# Altium PCB UPCNSL-ABS-FLS-ARD.PcbDoC (part 2 of 2)
Units mm, origin at the board's own origin, x right, y up, seen from the top; angles counter-clockwise.
Board outline 96 x 90 mm, 2 copper layers (Top Layer, Bottom Layer); 116 components, 156 nets, 541 pads, 110 vias.
Unrouted connection lines stored in the file: 18.
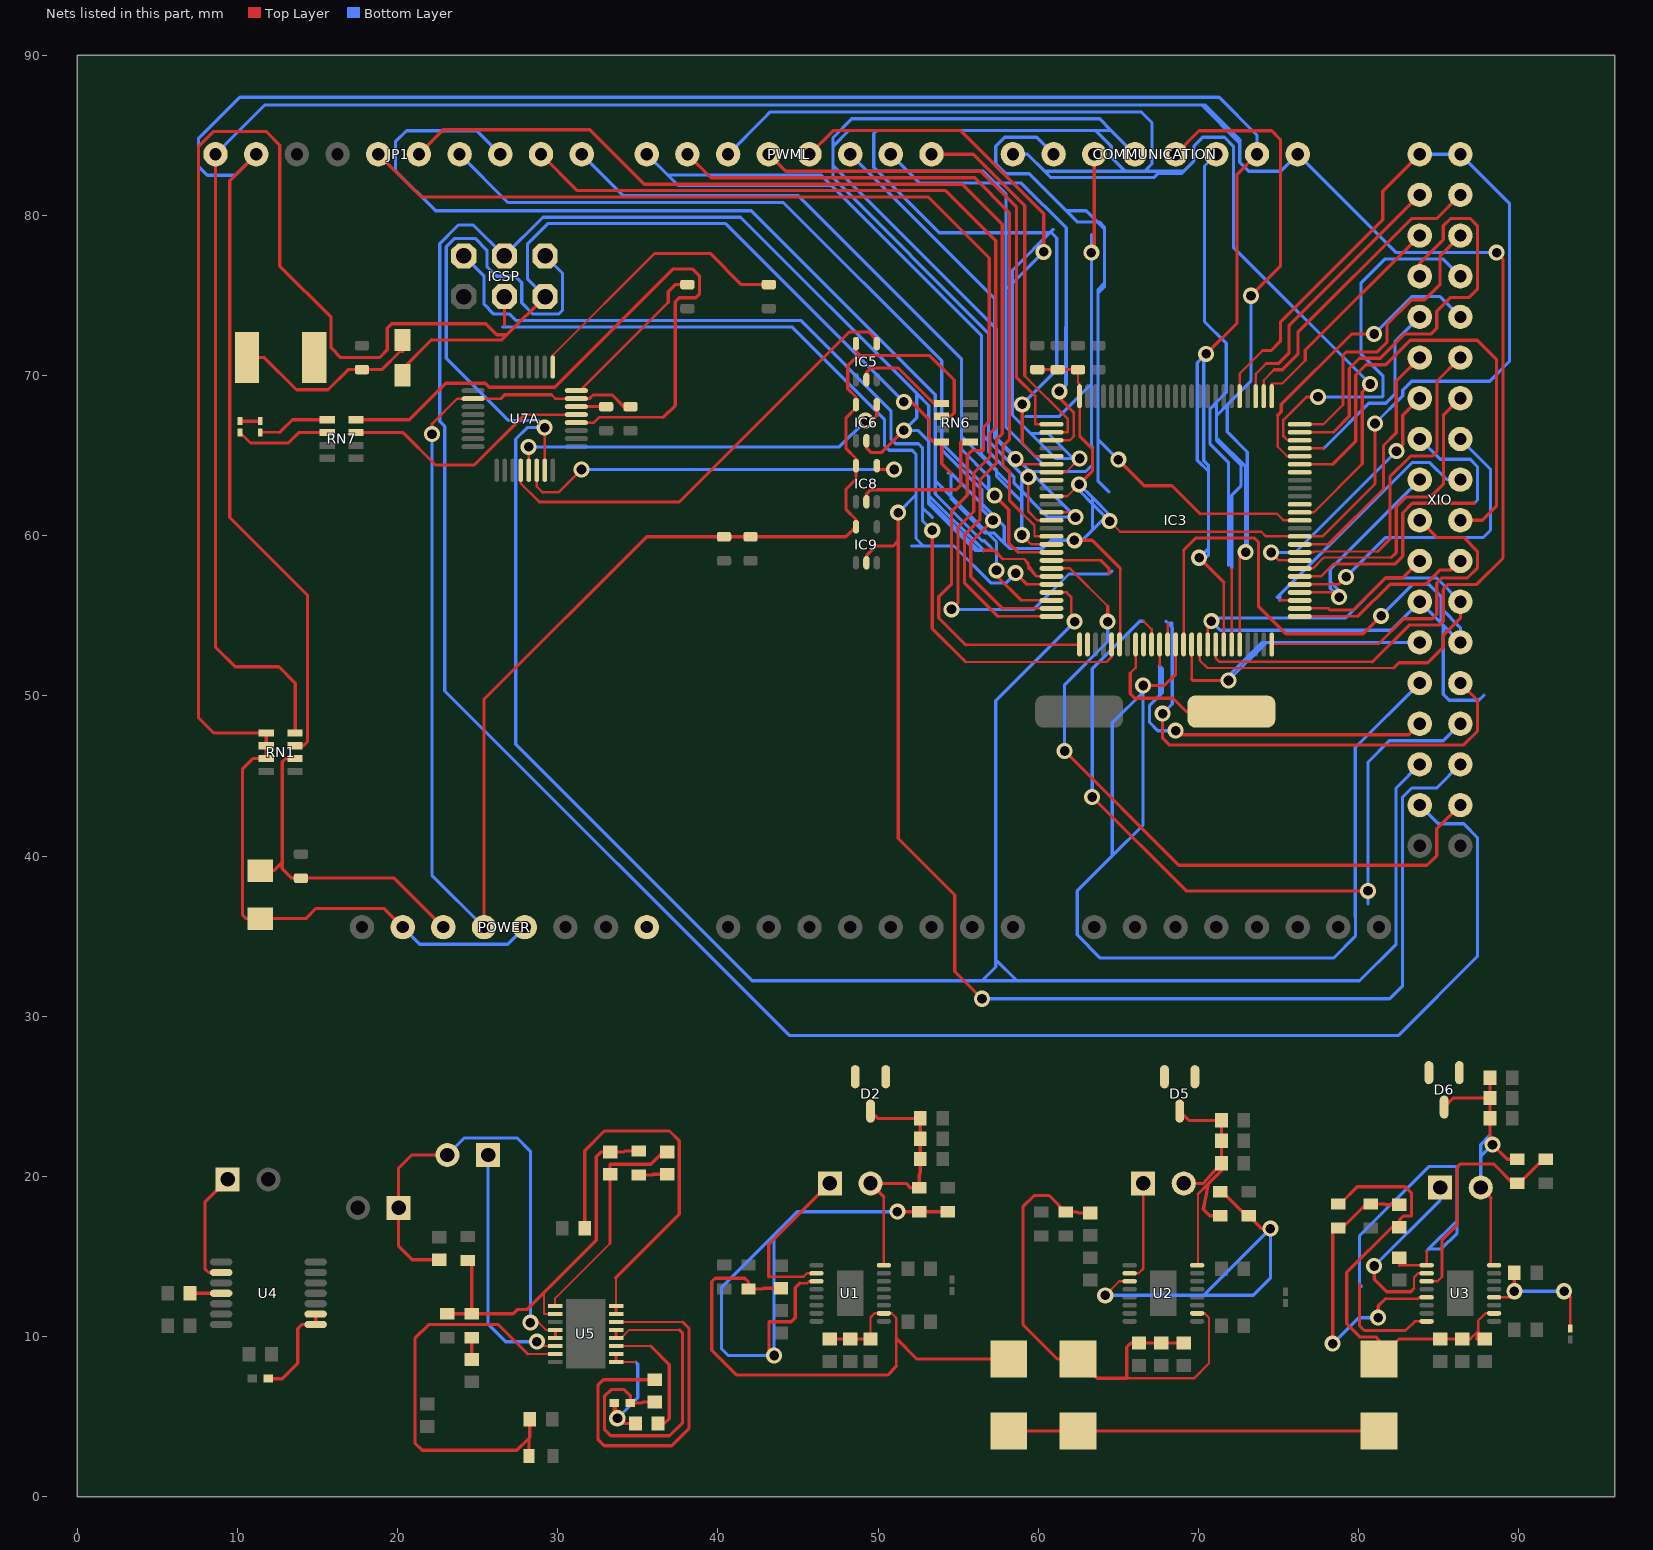
[diagram p2: the nets of this part, all layers, seen from the top]

## Via types
v1: diameter 1, hole 0.6, Top Layer to Bottom Layer, 102 vias
v2: diameter 0.5, hole 0.2, Top Layer to Bottom Layer, 8 vias

## Nets (pads, with @x,y where several pads share a name; then routed paths per layer and width w, separated by ;. In a path a pad name is that pad's centre, name@x,y a point inside that pad or via, vN(x,y) a via of type N, cw(c..) or ccw(c..) an arc to the next point about the centre after c; other vN are vias at no path point) (continued)
NetC25_2: C25.2 L3.2 U3.12 | length 8.3
  Top Layer w0.15: L3.2@93.218,10.51 93.218,12.446
  Top Layer w0.153: U3.12@88.467,12.45 v1@89.459,12.45
  Top Layer w0.2: v1@89.459,12.45 v1@89.724,12.715 ; v1(89.724,12.827) C25.2@89.724,13.97 ; v1(92.837,12.827) 93.218,12.446
  Bottom Layer w0.2: v1@89.724,12.715 v1@89.836,12.827 ; v1(89.724,12.827) v1@89.836,12.827 ; v1(92.837,12.827) v1@89.836,12.827
NetC26_2: C26.2 U3.1 U3.8 | length 30.3
  Top Layer w0.153: 82.55,14.45 U3.1@84.253,14.45 84.253,15.343 ; 82.941,10.376 83.515,10.95 U3.8@84.253,10.95
  Top Layer w0.2: 80.061,13.259 80.061,10.681 80.366,10.376 82.941,10.376 ; 82.55,14.45 C26.2@82.55,14.924
  Bottom Layer w0.2: 80.188,13.132 80.061,13.259 80.061,16.281 84.404,20.625 86.055,20.625 86.157,20.523 86.157,17.247 ; 84.253,15.343 84.379,15.469 ; 84.379,15.469 85.166,15.469 86.157,16.459 86.157,17.247 ; 84.379,15.469 86.157,17.247
NetC27_2: C27.2 R11.1 R12.2 U3.5 | length 19.5
  Top Layer w0.153: 81.686,12.37 83.718,12.37 83.799,12.45 U3.5@84.253,12.45
  Top Layer w0.2: v1(78.384,9.55) 78.384,16.776 R11.1@78.74,16.776 78.994,16.776 80.494,18.276 R12.2@80.772,18.276 81.636,18.276 81.686,18.226 C27.2@82.55,18.226 ; v1(81.229,11.176) 81.229,11.913 81.686,12.37
  Bottom Layer w0.2: v1(78.384,9.55) 80.01,11.176 v1(81.229,11.176)
NetC32_2: C32.2 U4.4 | length 1.9
  Top Layer w0.2: C32.2@7.05,12.7 U4.4@8.988,12.7
NetC34_2: C34.2 P5.2 P6.1 U5.4 U5.5 | length 30.1
  Top Layer w0.125: 28.804,10.871 29.265,10.41 U5.4@29.855,10.41
  Top Layer w0.2: C34.2@22.606,14.794 20.918,14.794 20.066,15.646 P6.1@20.066,18.034 20.066,20.523 20.879,21.336 P5.2@23.114,21.336 ; v1(28.296,10.871) 28.804,10.871 ; U5.5@29.855,9.91 U5.4@29.855,10.41
  Bottom Layer w0.2: P5.2@23.114,21.336 24.181,22.403 27.457,22.403 28.296,21.565 v1(28.296,10.871)
NetC35_1: C35.1 L5.2 U5.12 U5.13 | length 21.9
  Top Layer w0.125: U5.12@33.645,9.91 33.96,9.91 34.464,10.414 37.592,10.414
  Top Layer w0.2: U5.12@33.645,9.91 U5.13@33.645,10.41 ; C35.1@36.068,5.904 35.317,5.904 35.255,5.842 L5.2@34.536,5.842 34.536,6.299 34.147,6.688 33.332,6.688 32.918,6.274 32.918,4.216 33.325,3.81 36.982,3.81 37.795,4.623 37.795,10.211 37.592,10.414
NetC35_2: C35.2 U5.14 | length 24.3
  Top Layer w0.125: U5.14@33.645,10.91 37.795,10.91
  Top Layer w0.2: C35.2@36.068,7.304 32.856,7.304 32.512,6.96 32.512,3.581 32.918,3.175 37.109,3.175 38.202,4.267 38.202,10.504 37.795,10.91
NetC36_1: C36.1 L5.1 U5.9 U5.10 | length 9.1
  Top Layer w0.125: U5.9@33.645,8.41 34.872,8.41
  Top Layer w0.2: v1@33.536,5.072 L5.1@33.536,5.842 v1(33.731,4.902) ; U5.9@33.645,8.41 U5.10@33.645,8.91 ; v1(33.718,4.889) 34.036,4.572 C36.1@34.86,4.572
  Bottom Layer w0.2: v1@33.536,5.072 v1(33.718,4.889) v1(33.731,4.902) 35.001,6.172 35.001,8.28 34.872,8.41
NetC36_2: C36.2 U5.11 | length 8
  Top Layer w0.125: U5.11@33.645,9.41 35.803,9.41
  Top Layer w0.2: 35.803,9.41 36.968,8.245 36.968,4.877 36.663,4.572 C36.2@36.26,4.572
NetC37_2: C37.2 U5.15 U5.16 | length 24
  Top Layer w0.125: 33.63,13.665 33.63,11.91 U5.16@33.645,11.91
  Top Layer w0.2: C37.2@31.688,16.764 31.688,21.604 32.918,22.835 36.982,22.835 37.592,22.225 37.592,17.628 33.63,13.665 ; U5.15@33.645,11.41 U5.16@33.645,11.91
NetC38_2: C38.2 R13.2 U5.7 | length 26.4
  Top Layer w0.125: 28.136,8.91 U5.7@29.855,8.91
  Top Layer w0.2: 28.136,8.91 26.302,10.744 21.946,10.744 21.082,9.881 21.082,3.353 21.539,2.896 27.444,2.896 28.206,3.658 ; R13.2@28.206,2.54 28.206,3.658 ; C38.2@28.256,4.826 28.256,3.708 28.206,3.658
NetC39_1: C39.1 R14.1 R15.1 R16.1 R17.2 U5.2 | length 24.8
  Top Layer w0.125: 29.134,12.725 29.134,11.41 U5.2@29.855,11.41
  Top Layer w0.2: R15.1@23.114,11.418 R16.1@24.638,11.418 ; R17.2@24.384,14.744 24.638,14.744 R16.1@24.638,11.418 ; R14.1@35.052,21.578 34.188,21.578 34.138,21.528 C39.1@33.274,21.528 32.715,21.528 32.41,21.223 32.41,16.002 29.134,12.725 28.102,11.694 27.494,11.694 27.218,11.418 R16.1@24.638,11.418
NetC39_2: C39.2 C40.1 U5.1 | length 14.1
  Top Layer w0.125: U5.1@29.855,11.91 29.845,11.91 29.845,12.395 33.274,15.824
  Top Layer w0.2: 33.274,15.824 C39.2@33.274,20.128 33.274,20.752 35.814,20.752 36.59,21.528 C40.1@36.83,21.528
NetC40_2: C40.2 R14.2 | length 1.8
  Top Layer w0.2: R14.2@35.052,20.078 35.916,20.078 35.966,20.128 C40.2@36.83,20.128
NetC41_2: C41.2 R16.2 | length 1.3
  Top Layer w0.2: C41.2@24.638,8.574 R16.2@24.638,9.918
NetC51_1: C51.1 F2.1 L7.2 | length 12.3
  Top Layer w0.2: F2.1@10.6,71.12 11.684,71.12 13.691,69.113 15.66,69.113 16.916,70.37 C51.1@17.78,70.37 19.025,70.37 20.156,71.501 20.32,71.501 L7.2@20.32,72.22
NetC52_2: C52.2 U7A.25 | length 17.7
  Top Layer w0.15: U7A.25@29.69,70.535 29.69,71.27 36.043,77.622
  Top Layer w0.2: 36.043,77.622 39.522,77.622 41.465,75.68 C52.2@43.18,75.68
NetC53_2: C53.2 U7A.24 | length 10.1
  Top Layer w0.15: U7A.24@31.165,69.06 31.394,69.06 36.896,74.562
  Top Layer w0.2: 36.896,74.562 36.896,75.234 37.342,75.68 C53.2@38.1,75.68
NetC54_1: C54.1 U7A.22 | length 1.9
  Top Layer w0.2: U7A.22@31.165,68.06 C54.1@33.02,68.06
NetD2_1: D2.1
NetD2_2: D2.2
NetD5_1: D5.1
NetD5_2: D5.2
NetD6_1: D6.1
NetD6_2: D6.2
NetF2_2: F2.2
NetL4_1: L4.1 U4.8 U4.9 | length 6.3
  Top Layer w0.2: L4.1@11.93,7.366 12.802,7.366 13.767,8.331 13.767,10.496 14.021,10.75 U4.8@14.888,10.75 U4.9@14.888,11.4
NetP1_1: P1.1 U1.2 | length 10.5
  Top Layer w0.153: 43.18,13.731 45.354,13.731 45.573,13.95 U1.2@46.153,13.95
  Top Layer w0.2: 43.18,13.731 43.18,15.748 P1.1@46.99,19.558
NetP2_1: P2.1 U2.2 | length 6.3
  Top Layer w0.153: U2.2@65.711,13.95 66.274,13.95 66.548,14.224 P2.1@66.548,19.558
NetP3_1: P3.1 U3.2 | length 11.9
  Top Layer w0.153: 83.464,13.005 83.464,13.696 83.718,13.95 U3.2@84.253,13.95
  Top Layer w0.2: v1(80.975,14.402) 80.975,13.589 81.763,12.802 83.261,12.802 83.464,13.005
  Bottom Layer w0.2: v1(80.975,14.402) 85.09,18.517 P3.1@85.09,19.304
NetP4_1: P4.1 U4.2 | length 7.3
  Top Layer w0.2: U4.2@8.988,14 8.2,14 7.976,14.224 7.976,18.39 P4.1@9.398,19.812
NetP5_1: P5.1 U5.6 | length 15.3
  Top Layer w0.125: v1(28.702,9.677) 28.969,9.41 U5.6@29.855,9.41
  Bottom Layer w0.2: P5.1@25.654,21.336 25.654,10.77 26.746,9.677 v1(28.702,9.677)
NetR1_1: R1.1 R2.2 U1.3 | length 38.3
  Top Layer w0.153: 45.11,13.335 45.58,13.335 45.695,13.45 U1.3@46.153,13.45
  Top Layer w0.2: v1(43.51,8.814) 43.192,9.132 43.192,10.922 44.577,10.922 44.831,11.176 44.831,13.056 45.11,13.335 ; v1(51.206,17.792) R1.1@52.578,17.792 R2.2@54.356,17.792
  Bottom Layer w0.2: v1(51.206,17.792) 44.945,17.792 43.51,16.358 ; 43.51,16.358 v1(43.51,8.814) 40.64,8.814 40.234,9.22 40.234,13.081 43.51,16.358
NetR5_1: R5.1 R6.2 U2.3 | length 25.7
  Top Layer w0.153: v1(64.186,12.573) 65.063,13.45 U2.3@65.711,13.45
  Top Layer w0.2: R5.1@71.374,19.038 71.501,19.038 73.001,17.538 R6.2@73.152,17.538 73.951,16.739 v1(74.498,16.739)
  Bottom Layer w0.2: v1(64.186,12.573) 70.333,12.573 ; 70.333,12.573 v1(74.498,16.739) 74.498,13.64 73.431,12.573 70.333,12.573
NetR9_1: R9.1 R10.2 U3.3 | length 15.1
  Top Layer w0.153: U3.3@84.253,13.45 84.938,13.45 85.217,13.729
  Top Layer w0.2: 85.217,13.729 85.217,16.039 86.157,16.978 86.157,20.574 86.36,20.777 88.429,20.777 89.637,19.57 R9.1@89.916,19.57 90.043,19.57 91.543,21.07 R10.2@91.694,21.07
NetRN7_1: RN7.1 Z4.2 | length 4.5
  Top Layer w0.15: Z4.2@11.43,66.452 11.43,66.446 12.649,66.446
  Top Layer w0.2: 12.649,66.446 13.443,67.24 RN7.1@15.61,67.24
NetRN7_2: RN7.2 U7A.20 | length 41.7
  Top Layer w0.15: U7A.20@31.165,67.06 32.258,67.06 32.584,67.386 36.601,67.386
  Top Layer w0.2: RN7.2@17.41,67.24 20.735,67.24 23.015,69.52 25.476,69.52 25.73,69.266 29.82,69.266 37.211,76.657 38.405,76.657 38.862,76.2 38.862,75.108 38.608,74.854 37.592,74.854 37.338,74.6 37.338,68.123 36.601,67.386
NetRN7_3: RN7.3 Z3.2 | length 6
  Top Layer w0.15: Z3.2@10.16,66.452 10.826,65.786
  Top Layer w0.2: 10.826,65.786 13.183,65.786 13.837,66.44 RN7.3@15.61,66.44
NetRN7_4: RN7.4 U7A.21 | length 15.9
  Top Layer w0.15: 27.936,67.56 U7A.21@31.165,67.56
  Top Layer w0.2: RN7.4@17.41,66.44 20.347,66.44 22.373,64.414 24.79,64.414 27.936,67.56
NetX3_S1: Z3.1 Z4.1 | length 1.3
  Top Layer w0.2: Z3.1@10.16,67.152 Z4.1@11.43,67.152
PA0: IC3.78 XIO.3 | length 17.3
  Top Layer w0.15: IC3.78@73.58,68.71 73.58,70.104 74.234,70.758
  Top Layer w0.2: 74.234,70.758 75.025,70.758 75.656,71.389 75.656,73.116 XIO.3@83.82,81.28
PA1: IC3.77 XIO.4 | length 18.9
  Top Layer w0.15: IC3.77@74.08,68.71 74.08,69.71 74.728,70.358
  Top Layer w0.2: 74.728,70.358 75.248,70.358 76.213,71.323 76.213,72.708 83.312,79.807 84.887,79.807 XIO.4@86.36,81.28
PA2: IC3.76 XIO.5 | length 14.2
  Top Layer w0.15: IC3.76@74.58,68.71 74.58,69.5 75.239,69.5 76.676,70.937
  Top Layer w0.2: 76.676,70.937 76.676,71.596 XIO.5@83.82,78.74
PA3: IC3.75 XIO.6 | length 18.4
  Top Layer w0.15: IC3.75@76.33,66.96 77.808,66.96 79.026,68.178
  Top Layer w0.2: 79.026,68.178 79.026,71.253 79.248,71.475 81.165,71.475 81.775,72.085 81.775,73.19 83.312,74.727 84.125,74.727 85.09,75.692 85.09,77.47 XIO.6@86.36,78.74
PA4: IC3.74 XIO.7 | length 27.4
  Top Layer w0.15: IC3.74@76.33,66.46 78.435,66.46
  Top Layer w0.2: 78.435,66.46 79.426,67.451 79.426,70.441 80.061,71.075 81.369,71.075 82.891,72.598 84.536,72.598 84.887,72.949 84.887,74.016 85.75,74.879 86.919,74.879 87.422,75.382 87.422,79.35 86.97,79.802 85.75,79.802 85.293,79.345 85.293,78.486 83.82,77.013 XIO.7@83.82,76.2
PA5: IC3.73 XIO.8 | length 23.9
  Top Layer w0.15: IC3.73@76.33,65.96 75.565,65.96 75.305,66.22 75.305,67.228 76.746,68.669
  Top Layer w0.2: 76.746,68.669 v1(77.47,68.669)
  Bottom Layer w0.2: v1(77.47,68.669) 81.483,68.669 81.534,68.72 81.534,69.952 80.162,71.323 80.162,75.794 81.636,77.267 85.293,77.267 XIO.8@86.36,76.2
PA6: IC3.72 XIO.9 | length 12.8
  Top Layer w0.15: IC3.72@76.33,65.46 77.83,65.46
  Bottom Layer w0.2: 77.83,65.46 78.029,65.659 80.639,68.269 81.706,68.269 82.271,68.834 82.271,72.111 XIO.9@83.82,73.66
PA7: IC3.71 XIO.10 | length 18.9
  Top Layer w0.15: 74.955,67.514 74.955,65.558 75.553,64.96 IC3.71@76.33,64.96
  Top Layer w0.2: 74.955,67.514 75.176,67.735 75.176,68.205 79.564,72.593 v1(80.975,72.593)
  Bottom Layer w0.2: v1(80.975,72.593) 83.312,74.93 85.09,74.93 XIO.10@86.36,73.66
PB0_SS: IC3.19 XIO.34 | length 44.8
  Top Layer w0.15: IC3.19@60.83,57.96 61.976,57.96 64.338,55.598
  Top Layer w0.2: v1(61.646,46.558) 68.783,39.421 84.272,39.421 84.882,40.03 84.882,41.702 XIO.34@86.36,43.18 ; v1(64.338,54.635) 64.338,55.598
  Bottom Layer w0.2: v1(61.646,46.558) 61.646,50.704 64.338,53.396 v1(64.338,54.635)
PB1_SCK: IC3.20 IC6.2 ICSP.3 XIO.33 | length 187.4
  Top Layer w0.15: 57.785,58.547 59.137,58.547 ; IC3.20@60.83,57.46 59.888,57.46 ; 59.137,58.547 59.374,58.31 59.374,58.204 ; 59.137,58.547 59.374,58.204 ; 59.374,58.204 59.888,57.46 ; 59.374,58.204 59.374,57.974 59.888,57.46
  Top Layer w0.2: IC6.2@49.276,65.931 49.276,65.481 49.555,65.202 50.241,65.202 v1(51.613,66.573) ; 56.591,59.088 57.244,59.088 57.785,58.547
  Bottom Layer w0.2: 56.591,59.055 56.591,59.088 ; XIO.33@83.82,43.18 84.988,42.012 86.563,42.012 87.427,41.148 87.427,33.731 82.499,28.804 44.45,28.804 22.952,50.302 22.952,66.826 22.631,67.146 22.631,78.232 23.8,79.4 24.74,79.4 ICSP.3@26.67,77.47 29.083,79.883 41.415,79.883 52.413,68.885 ; 52.413,68.885 52.413,67.373 v1(51.613,66.573) 52.489,66.573 53.168,65.894 ; 52.413,68.885 53.168,68.129 53.168,65.894 ; 53.168,62.177 56.257,59.088 ; 53.168,62.177 53.168,62.51 ; 53.168,62.177 53.168,61.985 56.066,59.088 56.257,59.088 ; 53.168,62.51 53.168,65.894 ; 53.168,62.51 56.591,59.088 ; 56.257,59.088 56.591,59.088
PB2_MOSI: IC3.21 IC9.2 ICSP.4 XIO.32 | length 127.9
  Top Layer w0.15: 59.296,56.96 IC3.21@60.83,56.96
  Top Layer w0.2: 26.67,73.127 ICSP.4@26.67,74.93 ; IC9.2@49.276,58.311 49.276,58.75 49.885,59.36 50.939,59.36 51.257,59.677 ; v1(51.257,61.443) 51.257,59.677 ; v1(56.49,31.09) 54.788,32.791 54.788,37.567 51.257,41.097 51.257,59.677 ; v1(58.598,57.658) 59.296,56.96
  Bottom Layer w0.2: 26.568,73.025 26.772,73.025 ; 26.67,73.127 26.772,73.025 ; v1(51.257,61.443) 52.368,62.554 ; 52.09,59.36 52.832,59.36 ; v1(56.49,31.09) 81.94,31.09 82.753,31.902 82.753,43.688 83.312,44.247 84.887,44.247 XIO.32@86.36,45.72 ; v1(58.598,57.658) 57.981,57.041 57.064,57.041 54.745,59.36 52.832,59.36 ; 26.772,73.025 44.647,73.025 50.4,67.272 50.4,65.634 50.699,65.335 52.127,65.335 52.368,65.094 52.368,62.554 ; 52.368,62.554 52.368,59.823 52.832,59.36
PB3_MISO: IC3.22 ICSP.1 U7A.15 XIO.31 | length 157
  Top Layer w0.15: U7A.15@29.19,64.085 v1(29.19,66.751) ; IC3.22@60.83,56.46 61.773,56.46 62.052,56.181 v1@62.052,54.864
  Top Layer w0.2: v1@62.052,54.864 v1(62.281,54.635)
  Bottom Layer w0.2: ICSP.1@29.21,77.47 30.298,76.382 30.298,74.066 30.074,73.842 28.448,73.842 27.758,74.533 27.758,75.794 27.351,76.2 26.187,76.2 25.582,76.805 25.582,77.826 24.846,78.562 23.571,78.562 23.038,78.029 23.038,71.077 26.92,67.195 28.746,67.195 v1(29.19,66.751) 28.088,66.751 27.377,66.04 27.377,46.967 42.137,32.207 56.49,32.207 ; v1(62.281,54.635) 57.353,49.708 57.353,33.528 ; XIO.31@83.82,45.72 82.347,44.247 82.347,34.493 80.061,32.207 58.674,32.207 ; 56.49,32.207 57.353,33.071 57.353,33.528 ; 56.49,32.207 58.674,32.207 ; 57.353,33.528 58.674,32.207
PB4: IC3.23 JP1.8 | length 71.9
  Top Layer w0.15: 58.932,55.96 IC3.23@60.83,55.96
  Top Layer w0.2: v1(57.399,57.841) 57.399,57.493 58.932,55.96
  Bottom Layer w0.2: JP1.8@26.416,83.82 24.954,85.282 20.561,85.282 19.869,84.591 19.869,82.798 22.384,80.283 42.088,80.283 53.568,68.802 53.568,63.443 ; v1(57.399,57.841) 57.399,58.92 ; 53.568,63.443 53.568,62.603 56.49,59.682 56.637,59.682 57.399,58.92 ; 53.568,63.443 57.399,59.612 57.399,58.92
PB5: IC3.24 JP1.7 | length 61.8
  Top Layer w0.15: 57.756,55.46 IC3.24@60.83,55.46
  Top Layer w0.2: v1(57.175,60.96) 55.791,59.576 55.791,57.424 57.756,55.46
  Bottom Layer w0.2: JP1.7@23.876,83.82 26.892,80.804 44.088,80.804 53.977,70.915 53.977,65.784 ; v1(57.175,60.96) 56.477,61.658 56.477,62.878 53.977,65.378 53.977,65.784 ; 57.582,62.179 53.977,65.784
PB6: IC3.25 JP1.6 | length 69.2
  Top Layer w0.15: 57.486,54.96 IC3.25@60.83,54.96
  Top Layer w0.2: JP1.6@21.336,83.82 22.86,85.344 32.004,85.344 35.401,81.947 55.264,81.947 57.76,79.451 57.76,66.357 57.391,65.989 57.391,64.522 56.375,63.506 56.375,61.022 55.391,60.038 55.391,57.055 57.486,54.96
PB7: IC3.26 JP1.5 | length 74.5
  Top Layer w0.15: 55.461,53.188 62.58,53.188 IC3.26@62.58,53.21
  Top Layer w0.2: JP1.5@18.796,83.82 21.469,81.147 53.129,81.147 56.939,77.337 56.939,67.137 56.591,66.789 56.591,65.329 55.88,65.329 55.575,65.024 55.575,62.514 54.591,61.53 54.591,57 53.785,56.193 53.785,54.864 55.461,53.188
PC0: IC3.53 XIO.18 | length 17
  Top Layer w0.15: 75.079,55.96 IC3.53@76.33,55.96
  Bottom Layer w0.2: 74.905,56.134 75.079,56.308 ; 75.079,55.96 75.079,56.308 ; XIO.18@86.36,63.5 85.522,63.5 84.455,64.567 83.337,64.567 75.079,56.308
PC1: IC3.54 XIO.17 | length 13.8
  Top Layer w0.15: IC3.54@76.33,56.46 v1@78.49,56.46
  Top Layer w0.2: v1@78.49,56.46 v1(78.791,56.159)
  Bottom Layer w0.2: v1(78.791,56.159) 78.232,56.718 78.232,57.125 ; v1@79.197,56.159 78.232,57.125 ; XIO.17@83.82,63.5 78.232,57.912 78.232,57.125
PC2: IC3.55 XIO.16 | length 19.8
  Top Layer w0.15: IC3.55@76.33,56.96 78.753,56.96
  Top Layer w0.2: 78.753,56.96 v1(79.223,57.429)
  Bottom Layer w0.2: v1(79.223,57.429) 81.675,59.882 87.771,59.882 88.24,60.35 88.24,64.16 XIO.16@86.36,66.04
PC3: IC3.56 XIO.15 | length 21.1
  Top Layer w0.15: IC3.56@76.33,57.46 77.666,57.46 78.435,58.229
  Top Layer w0.2: 78.435,58.229 82.263,58.229 82.758,58.725 82.758,61.418 83.362,62.022 87.219,62.022
  Bottom Layer w0.2: XIO.15@83.82,66.04 85.09,64.77 86.97,64.77 87.427,64.313 87.427,62.23 87.219,62.022
PC4: IC3.57 XIO.14 | length 18.6
  Top Layer w0.15: IC3.57@76.33,57.96 77.149,57.96 77.826,58.637 82.049,58.637
  Top Layer w0.2: 82.049,58.637 82.358,58.946 82.358,61.8 82.98,62.422 84.52,62.422 85.298,63.2 85.298,67.518 XIO.14@86.36,68.58
PC5: IC3.58 XIO.13 | length 16.3
  Top Layer w0.15: v1(74.549,58.953) 75.042,58.46 IC3.58@76.33,58.46
  Top Layer w0.2: v1(82.372,65.278) 82.758,65.664 82.758,67.518 XIO.13@83.82,68.58
  Bottom Layer w0.2: v1(74.549,58.953) 76.048,58.953 v1(82.372,65.278)
PC6: IC3.59 XIO.12 | length 19.9
  Top Layer w0.15: IC3.59@76.33,58.96 77.194,58.96 77.246,59.012 81.188,59.012
  Top Layer w0.2: 81.188,59.012 81.958,59.782 81.958,63.67 83.266,64.978 84.626,64.978 84.898,65.25 84.898,69.658 XIO.12@86.36,71.12
PC7: IC3.60 XIO.11 | length 15.8
  Top Layer w0.15: IC3.60@76.33,59.46 78.1,59.46
  Top Layer w0.2: 78.1,59.46 81.558,62.918 81.558,65.634 82.358,66.434 82.358,69.658 XIO.11@83.82,71.12
PD7: IC3.50 XIO.19 | length 21.4
  Top Layer w0.15: IC3.50@74.58,53.21 74.58,53.238 81.248,53.238
  Top Layer w0.2: 81.248,53.238 82.828,54.818 84.612,54.818 84.887,55.093 84.887,57.048 85.196,57.358 86.8,57.358 87.422,57.98 87.422,59.034 86.563,59.893 84.887,59.893 XIO.19@83.82,60.96
PE0: IC3.2 PWML.1 | length 23.4
  Top Layer w0.15: 59.159,69.981 61.855,67.285 61.855,66.46 IC3.2@60.83,66.46
  Top Layer w0.2: PWML.1@53.34,83.82 55.95,83.82 59.159,80.611 59.159,69.981
PE1: IC3.3 PWML.2 | length 27.9
  Top Layer w0.15: IC3.3@60.83,65.96 61.976,65.96 62.23,66.214 62.23,67.691
  Top Layer w0.2: v1(61.316,69.012) 61.316,68.605 62.23,67.691
  Bottom Layer w0.2: PWML.2@50.8,83.82 52.603,82.017 58.953,82.017 61.747,79.223 61.747,69.444 v1(61.316,69.012)
PE3: IC3.5 PWML.6 | length 84.4
  Top Layer w0.15: 59.004,65.786 59.83,64.96 IC3.5@60.83,64.96
  Top Layer w0.2: 59.004,65.786 v1(59.004,68.199)
  Bottom Layer w0.2: PWML.6@40.64,83.82 42.901,86.081 43.282,86.462 66.421,86.462 67.107,85.776 67.107,83.215 66.65,82.758 65.43,82.758 64.567,83.622 64.567,84.328 63.602,85.293 49.911,85.293 49.733,85.115 49.733,83.007 53.823,78.918 60.833,78.918 61.163,78.588 61.163,70.358 v1(59.004,68.199) ; 61.722,69.367 61.722,73.025
PE4: IC3.6 PWML.3 | length 52.8
  Top Layer w0.15: v1@58.933,64.46 IC3.6@60.83,64.46
  Top Layer w0.2: v1(58.598,64.795) v1@58.933,64.46
  Bottom Layer w0.2: PWML.3@48.26,83.82 49.322,82.758 ; v1(58.598,64.795) 57.288,66.105 57.288,74.792 49.322,82.758 ; 60.35,64.414 57.988,66.777 57.988,81.356 56.586,82.758 49.322,82.758
PE5: IC3.7 PWML.4 | length 46.9
  Top Layer w0.15: IC3.7@60.83,63.96 61.725,63.96 v1(62.586,64.821)
  Top Layer w0.2: PWML.4@45.72,83.82 47.193,85.293 55.156,85.293 60.345,80.104 v1(60.345,77.718)
  Bottom Layer w0.2: 58.115,75.489 58.395,75.768 ; v1(60.345,77.718) 58.395,75.768 ; 60.935,79.121 58.395,76.581 58.395,75.768 ; v1@62.586,64.414 v1@62.179,64.821 ; v1(62.586,64.821) v1@62.179,64.821 ; 58.395,75.768 58.395,67.526 59.538,66.383 ; 59.538,66.383 61.1,64.821 v1@62.179,64.821 ; 59.538,66.383 60.617,66.383 v1@62.179,64.821
PE6: IC3.8
PG0: IC3.51 XIO.22 | length 11.5
  Top Layer w0.15: IC3.51@76.33,54.96 79.959,54.96
  Top Layer w0.2: 79.959,54.96 81.97,56.971 84.205,56.971 85.096,57.862 85.802,57.862 XIO.22@86.36,58.42
PG1: IC3.52 XIO.21 | length 8.8
  Top Layer w0.15: IC3.52@76.33,55.46 78.112,55.46
  Top Layer w0.2: 78.112,55.46 78.212,55.359 79.68,55.359 81.691,57.371 82.771,57.371 XIO.21@83.82,58.42
PG2: IC3.70 XIO.20 | length 30.2
  Top Layer w0.15: IC3.70@76.33,64.46 78.38,64.46
  Top Layer w0.2: 78.38,64.46 79.826,65.906 79.826,70.034 80.467,70.675 81.704,70.675 83.226,72.198 87.422,72.198 88.622,70.998 88.622,61.863 87.719,60.96 XIO.20@86.36,60.96
PG5: IC3.1 PWML.5 | length 31.9
  Top Layer w0.15: 59.817,68.72 59.817,66.96 IC3.1@60.83,66.96
  Top Layer w0.2: PWML.5@43.18,83.82 44.247,82.753 56.41,82.753 58.638,80.525 58.638,69.899 59.817,68.72
PH3: IC3.15 PWML.7 | length 43.9
  Top Layer w0.15: 58.903,61.493 59.766,60.63 59.766,59.96 IC3.15@60.83,59.96
  Top Layer w0.2: PWML.7@38.1,83.82 39.573,82.347 56.032,82.347 58.204,80.175 58.204,65.993 57.798,65.587 57.798,64.414 58.217,63.995 58.217,62.179 58.903,61.493
PH4: IC3.16 PWML.8 | length 56.9
  Top Layer w0.15: v1(58.979,60.046) 59.564,59.46 IC3.16@60.83,59.46
  Bottom Layer w0.2: PWML.8@35.56,83.82 36.855,82.525 ; v1(58.979,60.046) 58.979,62.122 ; 36.855,82.525 46.431,82.525 47.087,81.869 ; 36.855,82.525 37.511,81.869 47.087,81.869 ; 47.087,81.869 56.464,72.492 56.464,66.345 ; 56.464,66.345 56.464,65.069 57.398,64.135 57.398,63.703 58.979,62.122 ; 56.464,66.345 58.979,63.83 58.979,62.122
PH5: IC3.17 JP1.10 | length 48.7
  Top Layer w0.15: 58.744,58.96 IC3.17@60.83,58.96
  Top Layer w0.2: v1(57.277,62.509) 58.166,61.62 58.166,59.538 58.744,58.96
  Bottom Layer w0.2: JP1.10@31.496,83.82 34.07,81.246 44.992,81.246 55.22,71.018 55.22,66.192 ; v1(57.277,62.509) 56.912,62.874 56.912,63.687 55.22,65.38 55.22,66.192 ; 58.09,63.322 55.22,66.192
PH6: IC3.18 JP1.9 | length 69.9
  Top Layer w0.15: IC3.18@60.83,58.46 63.917,58.46
  Top Layer w0.2: JP1.9@28.956,83.82 31.229,81.547 54.221,81.547 57.353,78.415 57.353,66.751 56.991,66.389 56.991,64.929 55.975,63.913 55.975,61.513 54.991,60.528 54.991,55.804 v1(54.585,55.397) ; 63.917,58.46 64.414,57.963 64.414,57.607
  Bottom Layer w0.2: v1(54.585,55.397) 59.711,55.397 61.921,57.607 64.414,57.607 64.592,57.785
PH7: IC3.27
PJ2: IC3.65
PJ6: IC3.69
PL0: IC3.35 XIO.30 | length 49.4
  Top Layer w0.15: 66.574,54.661 67.08,54.155 IC3.35@67.08,53.21
  Top Layer w0.2: v1(63.373,43.688) 69.24,37.821 v1(80.594,37.821)
  Bottom Layer w0.2: v1(63.373,43.688) 63.373,51.689 66.345,54.661 66.574,54.661 ; 80.594,37.008 v1(80.594,37.821) 80.594,45.872 81.915,47.193 85.293,47.193 XIO.30@86.36,48.26
PL1: IC3.36 XIO.29 | length 24.6
  Top Layer w0.15: 67.58,51.883 IC3.36@67.58,53.21
  Top Layer w0.2: v1(68.58,47.828) 68.834,47.574 83.134,47.574 XIO.29@83.82,48.26
  Bottom Layer w0.2: 67.564,51.867 67.58,51.851 ; 67.58,51.883 67.58,51.851 ; v1(68.58,47.828) 67.462,47.828 66.954,48.336 66.954,49.403 67.58,50.029 ; 67.58,50.029 67.767,50.216 67.767,51.664 67.58,51.851 ; 67.58,50.029 67.58,51.851
PL2: IC3.37 XIO.28 | length 38
  Top Layer w0.15: IC3.37@68.08,53.21 68.08,54.551
  Top Layer w0.2: v1(67.767,48.895) 67.767,47.346 68.174,46.939 86.563,46.939 87.427,47.803 87.427,49.733 XIO.28@86.36,50.8
  Bottom Layer w0.2: v1(67.767,48.895) 68.355,49.483 ; 67.97,54.661 68.08,54.551 ; 68.08,54.551 68.355,54.551 68.355,54.276 ; 68.08,54.551 68.355,54.276 ; 68.355,49.483 68.377,49.505 68.377,54.254 68.355,54.276 ; 68.355,49.483 68.355,54.276
PL3: IC3.38 XIO.27 | length 69.1
  Top Layer w0.15: 68.58,51.359 IC3.38@68.58,53.21
  Top Layer w0.2: v1(66.548,50.648) 67.869,50.648 68.58,51.359
  Bottom Layer w0.2: v1(66.548,50.648) v1@66.548,50.241 ; v1@66.954,50.648 v1@66.548,50.241 ; XIO.27@83.82,50.8 79.794,46.774 79.794,36.208 79.807,36.195 79.807,35.001 78.435,33.63 63.881,33.63 62.433,35.077 62.433,37.821 64.618,40.005 ; 64.618,40.005 64.618,48.311 v1@66.548,50.241 ; 64.618,40.005 66.548,41.935 v1@66.548,50.241
PL4: IC3.39 XIO.26 | length 34.7
  Top Layer w0.15: IC3.39@69.08,53.21 69.08,59.11
  Top Layer w0.2: 69.08,59.11 69.819,59.848 73.506,59.848 73.749,59.606 73.749,55.588 75.463,53.873 80.289,53.873 v1(81.407,54.991)
  Bottom Layer w0.2: v1(81.407,54.991) 83.374,56.958 84.393,56.958 85.161,56.19 85.161,55.458 ; 85.161,55.458 86.36,54.259 XIO.26@86.36,53.34 85.161,54.539 85.161,55.458
PL5: IC3.40 XIO.25 | length 21.2
  Top Layer w0.15: 69.58,51.027 IC3.40@69.58,53.21
  Top Layer w0.2: 69.58,51.027 69.648,50.958 v1(71.882,50.958)
  Bottom Layer w0.2: v1@71.501,50.851 73.99,53.34 74.264,53.34 ; v1(71.882,50.958) 74.264,53.34 ; XIO.25@83.82,53.34 74.264,53.34
PL6: IC3.41 XIO.24 | length 36.9
  Top Layer w0.15: IC3.41@70.08,53.21 70.08,52.222 70.563,51.74 82.194,51.74
  Top Layer w0.2: 82.194,51.74 82.525,52.07 84.328,52.07 85.293,53.035 85.293,53.775 86.36,54.842 XIO.24@86.36,55.88
  Bottom Layer w0.2: 71.298,54.864 79.192,54.864 81.686,57.358 84.882,57.358 XIO.24@86.36,55.88
PL7: IC3.42 XIO.23 | length 24.7
  Top Layer w0.15: IC3.42@70.58,53.21 70.58,54.426 v1(70.815,54.661)
  Bottom Layer w0.2: v1(70.815,54.661) 71.374,54.102 82.042,54.102 XIO.23@83.82,55.88 85.287,54.413 85.287,50.095 85.66,49.722 87.517,49.722 87.833,50.038
PWR_BTN: C45.1 C46.1 C47.1 D7.K IC3.10 IC3.31 IC3.61 IC3.80 IC3.100 ICSP.2 L7.1 POWER.2 POWER.5 RN1.1 RN1.3 RN1.5 RN6.7 XIO.1 XIO.2 | length 272.4
  Top Layer w0.15: IC3.10@60.83,62.46 61.812,62.46 v1(62.554,63.202) ; C46.1@62.484,70.37 62.484,69.565 62.58,69.469 IC3.100@62.58,68.71 62.58,68.136 62.605,68.136 62.605,66.198 ; v1(64.465,60.909) 65.126,60.248 73.93,60.248 74.219,59.96 IC3.61@76.33,59.96 77.758,59.96 81.026,63.228 ; IC3.31@65.08,53.21 65.08,53.289 65.126,53.335 65.126,57.959 ; IC3.80@72.58,68.71 72.58,70.128 74.017,71.565
  Top Layer w0.2: POWER.2@20.32,35.56 19.152,36.728 14.91,36.728 14.273,36.092 D7.K@11.43,36.092 10.566,36.092 10.312,36.346 10.312,45.422 10.973,46.082 RN1.5@11.8,46.082 RN1.3@11.8,46.882 RN1.1@11.8,47.682 8.534,47.682 7.569,48.647 7.569,84.277 8.534,85.242 11.786,85.242 12.649,84.379 12.649,76.835 15.85,73.635 15.85,71.73 16.46,71.12 18.872,71.12 19.355,71.603 19.355,72.949 19.634,73.228 25.502,73.228 26.188,72.542 26.822,72.542 ; L7.1@20.32,70.02 20.32,70.434 22.123,72.238 22.136,72.225 26.505,72.225 26.822,72.542 ; ICSP.2@29.21,74.93 26.822,72.542 ; v1(51.613,68.351) 52.071,68.351 53.188,67.234 53.188,66.11 53.442,65.856 RN6.7@53.964,65.856 53.975,65.856 53.975,64.491 54.559,63.906 ; C47.1@59.944,70.37 C45.1@61.214,70.37 C46.1@62.484,70.37 ; v1(62.255,59.715) 63.369,59.715 65.126,57.959 ; v1(62.554,63.202) 63.386,64.033 63.386,65.418 62.605,66.198 ; 74.017,71.565 74.548,71.565 75.12,72.136 75.12,73.335 81.509,79.724 81.509,81.509 XIO.1@83.82,83.82 ; 81.026,63.228 v1(81.026,67.005)
  Bottom Layer w0.2: POWER.2@20.32,35.56 21.387,34.493 26.873,34.493 POWER.5@27.94,35.56 ; ICSP.2@29.21,74.93 28.118,76.022 28.118,78.232 29.369,79.483 40.481,79.483 v1(51.613,68.351) ; 54.381,63.906 54.559,63.906 ; v1(62.554,63.202) 62.554,62.821 63.398,61.976 ; v1@62.56,63.195 63.398,62.357 ; v1(81.026,67.005) 82.758,68.737 82.758,69.088 83.312,69.642 88.189,69.642 89.421,70.874 89.421,80.759 XIO.2@86.36,83.82 XIO.1@83.82,83.82 ; 54.559,63.906 54.559,62.294 56.693,60.16 57.264,60.16 57.887,59.538 ; 54.559,63.906 57.887,60.579 57.887,59.538 ; 57.887,59.538 58.215,59.209 60.301,59.209 60.808,59.715 v1(62.255,59.715) 62.738,59.715 63.398,60.376 ; 63.398,60.376 63.932,60.909 v1(64.465,60.909) ; 63.398,60.376 63.398,61.976 ; 63.398,61.976 v1(64.465,60.909) ; 63.398,61.976 63.398,62.357 ; 63.398,62.357 64.465,61.29 v1(64.465,60.909)
PWR_MAX: C48.1 C49.1 C50.1 IC5.5 IC6.5 IC8.5 IC9.5 POWER.4 RN6.3 U7A.2 U7A.23 | length 111
  Top Layer w0.15: 22.149,66.98 23.729,68.56 U7A.2@24.715,68.56 26.454,68.56 ; 29.616,68.796 29.851,68.56 U7A.23@31.165,68.56
  Top Layer w0.2: v1(22.149,66.345) 22.149,66.98 ; POWER.4@25.4,35.56 25.4,49.784 35.548,59.932 C49.1@40.386,59.932 C48.1@42.037,59.932 47.997,59.932 IC9.5@48.626,60.561 48.626,61.011 48.006,61.631 48.006,62.916 48.626,63.536 IC8.5@48.626,64.371 48.626,64.821 48.006,65.441 48.006,67.363 48.626,67.983 IC6.5@48.626,68.181 48.626,68.66 48.108,69.178 48.108,70.612 48.743,71.247 48.905,71.247 ; 26.454,68.56 26.69,68.796 29.616,68.796 ; U7A.23@31.165,68.56 31.979,68.56 32.202,68.783 33.401,68.783 34.124,68.06 C50.1@34.544,68.06 ; IC5.5@48.626,71.991 48.626,71.526 48.905,71.247 ; RN6.3@53.964,67.456 54.553,67.456 54.762,67.666 54.762,69.723 53.238,71.247 48.905,71.247
  Bottom Layer w0.2: v1(22.149,66.345) 22.149,38.811 POWER.4@25.4,35.56
RESET: IC3.30 ICSP.5 | length 61.1
  Top Layer w0.15: 55.469,52.113 64.268,52.113 64.58,52.426 IC3.30@64.58,53.21
  Top Layer w0.2: v1(53.385,60.332) 53.385,54.197 55.469,52.113
  Bottom Layer w0.2: ICSP.5@24.13,77.47 25.407,76.193 25.407,74.441 26.011,73.837 26.995,73.837 27.389,73.442 45.176,73.442 50.806,67.812 50.806,66.04 51.111,65.735 52.527,65.735 52.768,65.494 52.768,61.762 ; v1(53.385,60.332) 52.768,60.949 52.768,61.762 ; 53.385,61.145 52.768,61.762
RST_3V3: IC5.4 U7A.12 | length 28.4
  Top Layer w0.15: U7A.12@27.69,64.085 27.69,63.267 28.854,62.103
  Top Layer w0.2: 28.854,62.103 37.592,62.103 48.205,72.716 49.422,72.716 49.926,72.212 IC5.4@49.926,71.991
RST_5V: IC5.2 RN6.1 | length 6.2
  Top Layer w0.2: IC5.2@49.276,69.741 49.276,70.18 49.573,70.477 51.246,70.477 53.467,68.256 RN6.1@53.964,68.256
RST_BTN: C43.1 D7.A POWER.3 RN1.6 | length 20.7
  Top Layer w0.2: D7.A@11.43,39.092 12.27,39.092 12.802,39.624 ; RN1.6@13.6,46.082 13.005,46.082 12.802,45.879 12.802,39.624 ; POWER.3@22.86,35.56 19.8,38.62 C43.1@13.97,38.62 13.399,38.62 12.802,39.218 12.802,39.624
RXD1: COMMUNICATION.3 IC3.45 | length 43.4
  Top Layer w0.15: IC3.45@72.08,53.21 72.08,57.952
  Bottom Layer w0.2: COMMUNICATION.3@71.12,83.82 70.384,83.084 70.384,73.368 71.74,72.011 71.74,68.944 71.132,68.336 ; 71.888,58.144 71.888,64.565 70.733,65.721 70.733,67.936 71.132,68.336 ; 72.08,57.952 72.08,62.519 72.657,63.096 72.657,64.414 71.132,65.939 71.132,68.336
RXD2: COMMUNICATION.5 IC3.12 | length 98.8
  Top Layer w0.15: IC3.12@60.83,61.46 62.035,61.46 v1(62.332,61.163)
  Bottom Layer w0.2: v1@62.319,61.176 57.379,66.116 57.379,72.923 47.193,83.109 ; v1(62.332,61.163) 60.606,61.163 58.496,63.273 58.496,63.659 56.888,65.267 56.888,72.652 47.193,82.347 47.193,83.109 ; COMMUNICATION.5@66.04,83.82 64.567,85.293 ; 47.193,83.109 47.193,84.328 ; 47.193,84.328 48.158,85.293 64.567,85.293 ; 47.193,84.328 47.193,84.861 48.362,86.03 63.83,86.03 64.567,85.293
RXD3: COMMUNICATION.7 IC3.63 | length 58.7
  Top Layer w0.15: 70.104,61.366 74.905,61.366 75.311,60.96 IC3.63@76.33,60.96
  Top Layer w0.2: v1(64.999,64.745) 66.624,63.119 68.351,63.119 70.104,61.366
  Bottom Layer w0.2: COMMUNICATION.7@60.96,83.82 59.898,84.882 ; 64.414,62.738 63.729,63.424 63.729,66.015 ; v1(64.999,64.745) 63.729,66.015 ; 57.988,82.601 57.861,82.601 57.353,83.109 57.353,84.328 57.912,84.887 59.893,84.887 59.898,84.882 ; 57.988,82.601 59.436,82.601 61.747,80.289 62.992,80.289 63.691,79.591 ; 57.988,82.601 57.358,83.231 57.358,84.328 57.912,84.882 59.898,84.882 ; 57.988,82.601 57.997,82.592 59.441,82.592 62.442,79.591 63.691,79.591 ; 63.691,79.591 63.805,79.591 64.135,79.261 64.135,79.146 ; 63.691,79.591 64.135,79.146 ; 63.729,66.015 63.729,75.133 ; 63.729,75.133 64.135,75.54 64.135,75.749 ; 63.729,75.133 63.729,75.343 64.135,75.749 ; 64.135,75.749 64.135,79.146
SCK_3V3: IC6.4 U7A.13 | length 24.7
  Top Layer w0.15: U7A.13@28.19,64.085 v1(28.19,65.545)
  Top Layer w0.2: v1(49.225,67.183) 49.632,67.183 49.926,67.477 IC6.4@49.926,68.181
  Bottom Layer w0.2: v1(28.19,65.545) 47.587,65.545 v1(49.225,67.183)
SCL: COMMUNICATION.1 IC3.43 JP1.1 RN1.2 | length 173.2
  Top Layer w0.15: IC3.43@71.08,53.21 71.08,52.363 71.323,52.12 80.871,52.12
  Top Layer w0.2: JP1.1@8.636,83.82 8.636,53.035 9.855,51.816 12.598,51.816 13.614,50.8 13.614,47.682 RN1.2@13.6,47.682 ; 80.871,52.12 83.169,54.418 85.05,54.418 85.293,54.661 85.293,56.644 85.607,56.958 87.376,56.958 89.022,58.604 89.022,77.272 v1(88.621,77.673)
  Bottom Layer w0.2: JP1.1@8.636,83.82 11.709,86.893 70.201,86.893 ; v1(88.621,77.673) 82.347,77.673 COMMUNICATION.1@76.2,83.82 75.133,82.753 73.152,82.753 72.593,83.312 ; 70.201,86.893 72.587,84.507 72.587,83.318 72.593,83.312 ; 70.201,86.893 70.434,86.893 72.593,84.734 72.593,83.312
SDA: COMMUNICATION.2 IC3.44 JP1.2 RN1.4 | length 157.6
  Top Layer w0.15: IC3.44@71.58,53.21 71.58,53.886 71.59,53.886 71.59,57.086
  Top Layer w0.2: JP1.2@11.176,83.82 9.525,82.169 9.525,61.138 14.376,56.286 14.376,47.142 14.116,46.882 RN1.4@13.6,46.882 ; v1(70.053,58.623) 71.59,57.086 ; v1(70.485,71.349) 72.415,73.279 72.415,82.575 COMMUNICATION.2@73.66,83.82
  Bottom Layer w0.2: JP1.2@11.176,83.82 9.855,82.499 8.128,82.499 7.569,83.058 7.569,84.785 10.16,87.376 71.293,87.376 73.66,85.009 COMMUNICATION.2@73.66,83.82 ; v1@70.053,58.217 70.637,58.801 70.637,59.207 ; v1(70.053,58.623) 70.637,59.207 ; v1(70.485,71.349) v1@70.332,71.196 ; v1@70.332,71.196 70.332,64.669 70.637,64.364 70.637,64.008 ; v1@70.332,71.196 69.933,70.796 69.933,64.713 70.637,64.008 ; 70.637,59.207 70.637,64.008
SS_3V3: IC8.4 U7A.14 | length 25.4
  Top Layer w0.15: U7A.14@28.69,64.085 28.69,63.068 29.034,62.725 30.074,62.725 v1(31.484,64.135)
  Top Layer w0.2: IC8.4@49.926,64.371 49.926,64.135 v1(51.003,64.135)
  Bottom Layer w0.2: v1(31.484,64.135) v1(51.003,64.135)
SS_MAX5: IC8.2 RN6.8 | length 9.9
  Top Layer w0.2: IC8.2@49.276,62.121 49.276,62.586 49.555,62.865 54.887,62.865 55.169,63.147 55.169,65.856 RN6.8@55.764,65.856
TXD1: COMMUNICATION.4 IC3.46 | length 51.2
  Top Layer w0.15: IC3.46@72.58,53.21 72.58,58.61
  Top Layer w0.2: COMMUNICATION.4@68.58,83.82 70.042,85.282 74.574,85.282 75.122,84.734 75.122,76.82 v1(73.283,74.981) ; 72.58,58.61 v1(72.949,58.979)
  Bottom Layer w0.2: v1(73.283,74.981) 73.283,74.168 73.283,69.651 71.805,68.173 ; 71.805,68.173 71.805,66.479 73.057,65.227 73.057,59.087 v1(72.949,58.979) 72.949,64.313 71.133,66.129 71.133,67.501 71.805,68.173
TXD2: COMMUNICATION.6 IC3.13 | length 33.7
  Top Layer w0.15: v1(59.385,63.652) 59.385,61.507 59.932,60.96 IC3.13@60.83,60.96
  Top Layer w0.2: v1(63.322,77.673) 63.5,77.851 COMMUNICATION.6@63.5,83.82
  Bottom Layer w0.2: 59.207,67.437 61.29,67.437 63.322,69.469 ; v1(59.385,63.652) 59.741,64.008 62.979,64.008 63.386,64.414 63.386,65.545 63.322,65.608 63.322,69.469 ; 63.322,78.791 v1(63.322,77.673) 63.322,69.469
TXD3: COMMUNICATION.8 IC3.64 | length 53.6
  Top Layer w0.15: IC3.64@76.33,61.46 77.216,61.46 80.226,64.47
  Top Layer w0.2: 80.226,64.47 80.226,68.974 v1(80.721,69.469)
  Bottom Layer w0.2: COMMUNICATION.8@58.42,83.82 59.334,83.82 60.401,82.753 ; v1(80.721,69.469) 72.187,78.003 72.187,84.328 71.633,84.882 70.277,84.882 69.723,84.328 69.723,83.388 69.088,82.753 ; 60.401,82.753 69.088,82.753 ; 60.401,82.753 60.796,82.358 67.224,82.358 67.502,82.636 68.971,82.636 69.088,82.753
VDC: D1.2 D3.2 D4.2 | length 23.1
  Top Layer w0.2: D1.2@58.166,4.1 D3.2@62.484,4.1 D4.2@81.28,4.1
VIN: POWER.8
VIN_1: C1.2 C2.2 C3.2 D2.3 P1.2 R1.2 U1.16 | length 16.3
  Top Layer w0.153: U1.16@50.367,14.45 50.368,18.72
  Top Layer w0.2: D2.3@49.53,24.071 49.979,23.622 C3.2@52.64,23.622 C2.2@52.64,22.352 C1.2@52.64,21.082 52.64,20.204 52.578,20.142 R1.2@52.578,19.292 52.015,19.292 51.749,19.558 P1.2@49.53,19.558 50.368,18.72
VIN_2: C11.2 C12.2 C13.2 D5.3 P2.2 R5.2 U2.16 | length 18.3
  Top Layer w0.153: U2.16@69.925,14.45 69.977,14.45 69.977,18.898
  Top Layer w0.2: D5.3@68.834,24.071 69.41,23.495 C13.2@71.436,23.495 C12.2@71.436,22.225 C11.2@71.436,20.828 ; P2.2@69.088,19.558 70.307,19.558 C11.2@71.436,20.828 ; 69.977,18.898 70.637,19.558 ; R5.2@71.374,17.538 70.714,17.538 70.307,17.944 70.637,19.558 ; 70.637,19.558 71.436,20.357 C11.2@71.436,20.828
VIN_3: C21.2 C22.2 C23.2 D6.3 P3.2 R9.2 U3.16 | length 19.1
  Top Layer w0.153: 88.265,18.669 88.265,14.45 U3.16@88.467,14.45
  Top Layer w0.2: D6.3@85.344,24.325 85.911,24.892 C22.2@88.2,24.892 ; P3.2@87.63,19.304 88.265,18.669 ; C23.2@88.2,26.162 C22.2@88.2,24.892 ; R9.2@89.916,21.07 89.279,21.07 v1(88.364,21.985) 88.2,22.149 C21.2@88.2,23.622 C22.2@88.2,24.892
  Bottom Layer w0.2: P3.2@87.63,19.304 87.63,21.252 ; 88.2,22.555 87.63,21.985 87.63,21.252 ; v1(88.364,21.985) 87.63,21.252
VOUT_1: C7.2 C8.2 C9.2 C10.2 D1.1 R4.2 U1.10 | length 38
  Top Layer w0.153: C10.2@49.53,9.844 49.53,11.196 49.784,11.45 U1.10@50.367,11.45 50.856,11.45 51.141,11.165 51.141,9.885 51.141,8.139
  Top Layer w0.2: C7.2@43.942,13.016 42.842,13.016 42.792,12.966 R4.2@41.91,12.966 41.91,13.411 41.681,13.64 39.827,13.64 39.624,13.437 39.624,9.144 41.176,7.592 50.595,7.592 51.141,8.139 ; C8.2@46.99,9.844 C9.2@48.26,9.844 C10.2@49.53,9.844 ; 51.141,9.885 52.426,8.6 D1.1@58.166,8.6
VOUT_2: C17.2 C18.2 C19.2 C20.2 D3.1 R8.2 U2.10 | length 35
  Top Layer w0.153: 65.532,7.391 69.723,7.391 70.663,8.331 70.663,11.176 70.389,11.45 U2.10@69.925,11.45
  Top Layer w0.2: C17.2@63.246,17.718 62.509,17.718 62.459,17.768 R8.2@61.722,17.768 60.682,18.808 59.741,18.808 59.048,18.115 59.048,10.751 61.199,8.6 D3.1@62.484,8.6 63.693,7.391 65.532,7.391 65.532,9.347 65.775,9.59 C18.2@66.294,9.59 C19.2@67.691,9.59 C20.2@69.088,9.59
VOUT_3: C27.1 C28.2 C29.2 C30.2 D4.1 R11.2 U3.10 | length 29
  Top Layer w0.153: 86.97,9.844 87.478,10.352 87.478,10.998 87.929,11.45 U3.10@88.467,11.45
  Top Layer w0.2: R11.2@78.74,18.276 78.842,18.276 79.92,19.355 82.906,19.355 83.312,18.948 83.312,17.526 82.804,17.526 82.55,17.272 C27.1@82.55,16.826 82.091,16.826 79.267,14.002 79.267,10.789 80.08,9.976 81.077,9.976 81.28,9.773 D4.1@81.28,8.6 82.524,9.844 C28.2@85.09,9.844 C29.2@86.487,9.844 86.97,9.844 ; 87.478,10.352 87.396,9.942 87.376,9.844 C30.2@87.884,9.844
XTAL1: IC3.34
XTAL2: IC3.33 Y1.1 | length 10
  Top Layer w0.15: 65.748,51.423 66.08,51.755 IC3.33@66.08,53.21
  Top Layer w0.2: 65.748,51.423 65.748,50.14 66.04,49.848 68.415,49.848 69.24,49.022 Y1.1@72.06,49.022
pads on no net: IC3.4 IC3.9 IC3.14 IC3.28 IC3.29 IC3.47 IC3.48 IC3.49 IC3.67 IC3.68 IC3.79 POWER.1 RN1.7 RN1.8 RN6.5 RN6.6 RN7.5 RN7.6 RN7.7 RN7.8 U4.5 U4.12 U4.13 U7A.1 U7A.4 U7A.5 U7A.6 U7A.7 U7A.8 U7A.9 U7A.10 U7A.11 U7A.26 U7A.27 U7A.28 U7A.29 U7A.30 U7A.31 U7A.32

## Polygon pours and split planes (outlines as drawn)
GND on Top Layer "Top-GND" (solid, pour order 2): 0,90 0,0 96,0 96,90
GND on Bottom Layer "Top-GND" (solid, shelved, pour order 4): 0,90 0,0 96,0 96,90

## Keep-outs
Keep-Out Layer:
  lines w0.3: 1.3,1.3 94.7,1.3 94.7,88.7 1.3,88.7 1.3,1.3

## Text inside footprints (layer, text, board x,y; h text height)
ADCH: Top Overlay "A8" at 64.262,37.338 h1.52 r90; Top Overlay "A9" at 66.802,37.338 h1.52 r90; Top Overlay "A10" at 69.342,37.338 h1.52 r90; Top Overlay "A11" at 71.882,37.338 h1.52 r90; Top Overlay "A12" at 74.422,37.338 h1.52 r90; Top Overlay "A13" at 76.962,37.338 h1.52 r90; Top Overlay "A14" at 79.502,37.338 h1.52 r90; Top Overlay "A15" at 82.042,37.338 h1.52 r90
ADCL: Top Overlay "A7" at 59.182,37.338 h1.52 r90; Top Overlay "A6" at 56.642,37.338 h1.52 r90; Top Overlay "A5" at 54.102,37.338 h1.52 r90; Top Overlay "A4" at 51.562,37.338 h1.52 r90; Top Overlay "A3" at 49.022,37.338 h1.52 r90; Top Overlay "A2" at 46.482,37.338 h1.52 r90; Top Overlay "A1" at 43.942,37.338 h1.52 r90; Top Overlay "A0" at 41.402,37.338 h1.52 r90
COMMUNICATION: Top Overlay "TX3 14" at 59.182,73.66 h1.52 r90; Top Overlay "RX3 15" at 61.722,73.66 h1.52 r90; Top Overlay "TX2 16" at 64.262,73.66 h1.52 r90; Top Overlay "RX2 17" at 66.802,73.66 h1.52 r90; Top Overlay "TX1 18" at 69.342,73.914 h1.52 r90; Top Overlay "RX1 19" at 71.882,73.914 h1.52 r90; Top Overlay "SDA 20" at 74.422,73.406 h1.52 r90; Top Overlay "SCL 21" at 76.962,73.914 h1.52 r90
JP1: Top Overlay "AREF" at 14.478,76.454 h1.52 r90; Top Overlay "GND" at 17.018,77.978 h1.52 r90; Top Overlay "13" at 19.558,79.756 h1.52 r90; Top Overlay "12" at 22.098,79.756 h1.52 r90; Top Overlay "11" at 24.638,80.264 h1.52 r90; Top Overlay "10" at 27.178,79.756 h1.52 r90; Top Overlay "9" at 29.718,81.026 h1.52 r90; Top Overlay "8" at 32.258,81.026 h1.52 r90
POWER: Top Overlay "Vin" at 36.322,37.338 h1.52 r90; Top Overlay "GND" at 33.782,37.338 h1.52 r90; Top Overlay "GND" at 31.242,37.338 h1.52 r90; Top Overlay "5V" at 28.702,37.338 h1.52 r90; Top Overlay "3.3V" at 26.162,37.338 h1.52 r90; Top Overlay "RESET" at 23.622,37.338 h1.52 r90; Top Overlay "IOREF" at 21.082,37.338 h1.52 r90
PWML: Top Overlay "7" at 36.322,81.026 h1.52 r90; Top Overlay "6" at 38.862,81.026 h1.52 r90; Top Overlay "5" at 41.402,81.026 h1.52 r90; Top Overlay "4" at 43.942,81.026 h1.52 r90; Top Overlay "3" at 46.482,81.026 h1.52 r90; Top Overlay "2" at 49.022,81.026 h1.52 r90; Top Overlay "TX0 1" at 51.562,75.184 h1.52 r90; Top Overlay "RX0 0" at 54.102,74.93 h1.52 r90
XIO: Top Overlay "GND" at 88.138,39.878 h1.52; Top Overlay "SS" at 88.138,42.418 h1.52; Top Overlay "SCK" at 77.978,42.418 h1.52; Top Overlay "MOSI" at 88.138,44.958 h1.52; Top Overlay "MISO" at 76.708,44.958 h1.52; Top Overlay "49" at 88.138,47.498 h1.52; Top Overlay "48" at 79.502,47.498 h1.52; Top Overlay "47" at 88.138,50.038 h1.52; Top Overlay "46" at 79.502,50.038 h1.52; Top Overlay "45" at 88.138,52.578 h1.52; Top Overlay "44" at 79.502,52.578 h1.52; Top Overlay "43" at 88.138,55.118 h1.52; Top Overlay "42" at 79.502,55.118 h1.52; Top Overlay "41" at 88.138,57.658 h1.52; Top Overlay "40" at 79.502,57.658 h1.52; Top Overlay "39" at 88.138,60.198 h1.52; Top Overlay "38" at 79.502,60.198 h1.52; Top Overlay "37" at 88.138,62.738 h1.52; Top Overlay "36" at 79.502,62.738 h1.52; Top Overlay "35" at 88.138,65.278 h1.52; Top Overlay "34" at 79.502,65.278 h1.52; Top Overlay "33" at 88.138,67.818 h1.52; Top Overlay "32" at 79.502,67.818 h1.52; Top Overlay "31" at 88.138,70.358 h1.52; Top Overlay "30" at 79.502,70.358 h1.52; Top Overlay "29" at 88.138,72.898 h1.52; Top Overlay "28" at 79.502,72.898 h1.52; Top Overlay "27" at 88.138,75.438 h1.52; Top Overlay "26" at 79.502,75.438 h1.52; Top Overlay "25" at 88.138,77.978 h1.52; Top Overlay "24" at 79.502,77.978 h1.52; Top Overlay "23" at 88.138,80.518 h1.52; Top Overlay "22" at 79.502,80.518 h1.52; Top Overlay "5V" at 88.138,83.058 h1.52; Top Overlay "5V" at 79.502,83.058 h1.52